# EAGLE board Placa_control_suelo (EAGLE 5.11)
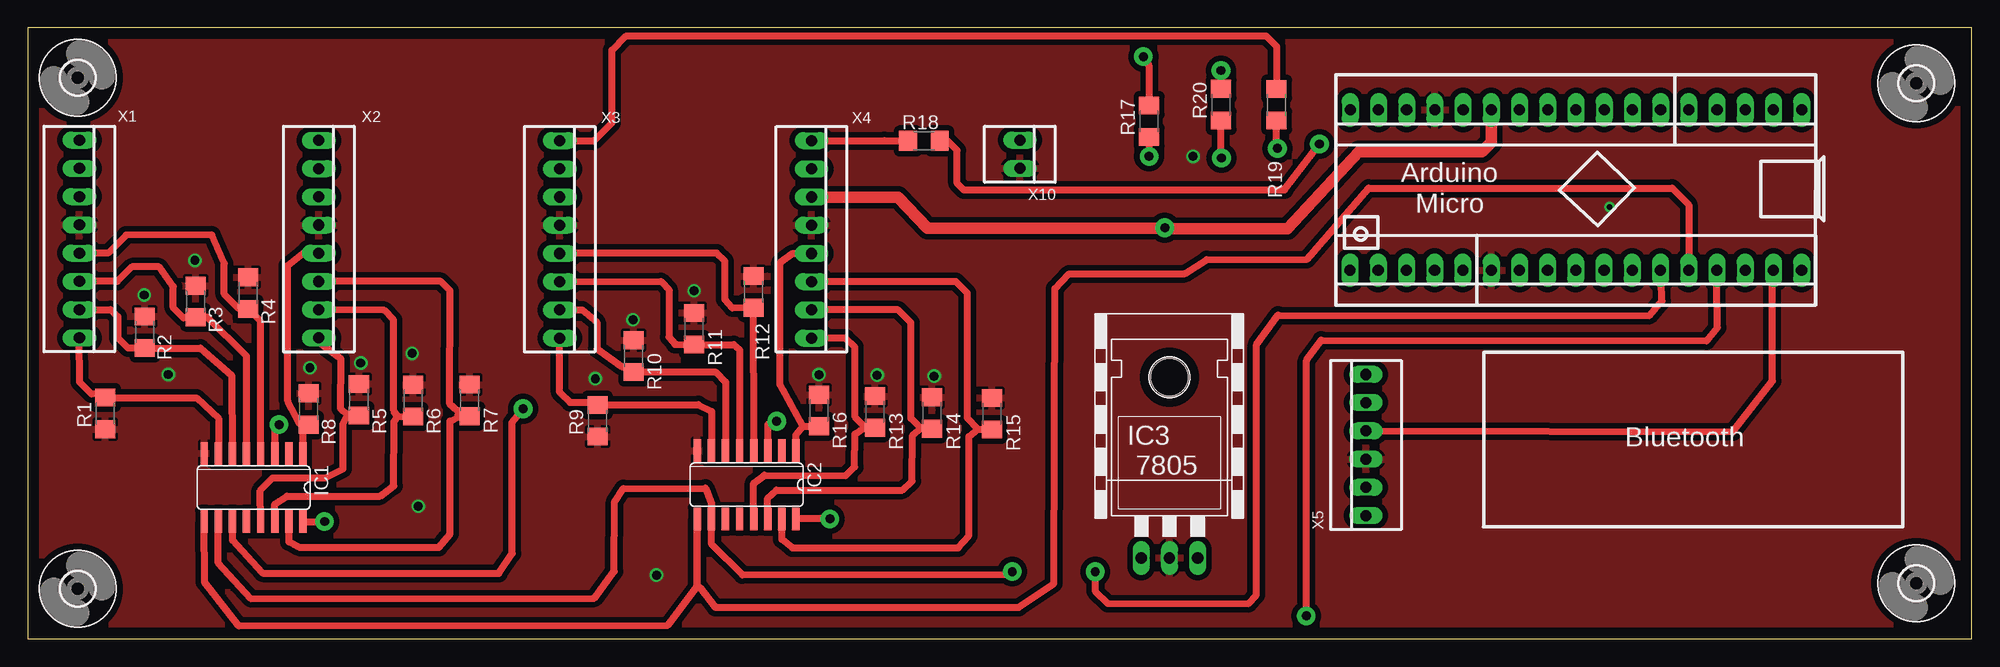
[diagram p0: board, top side]
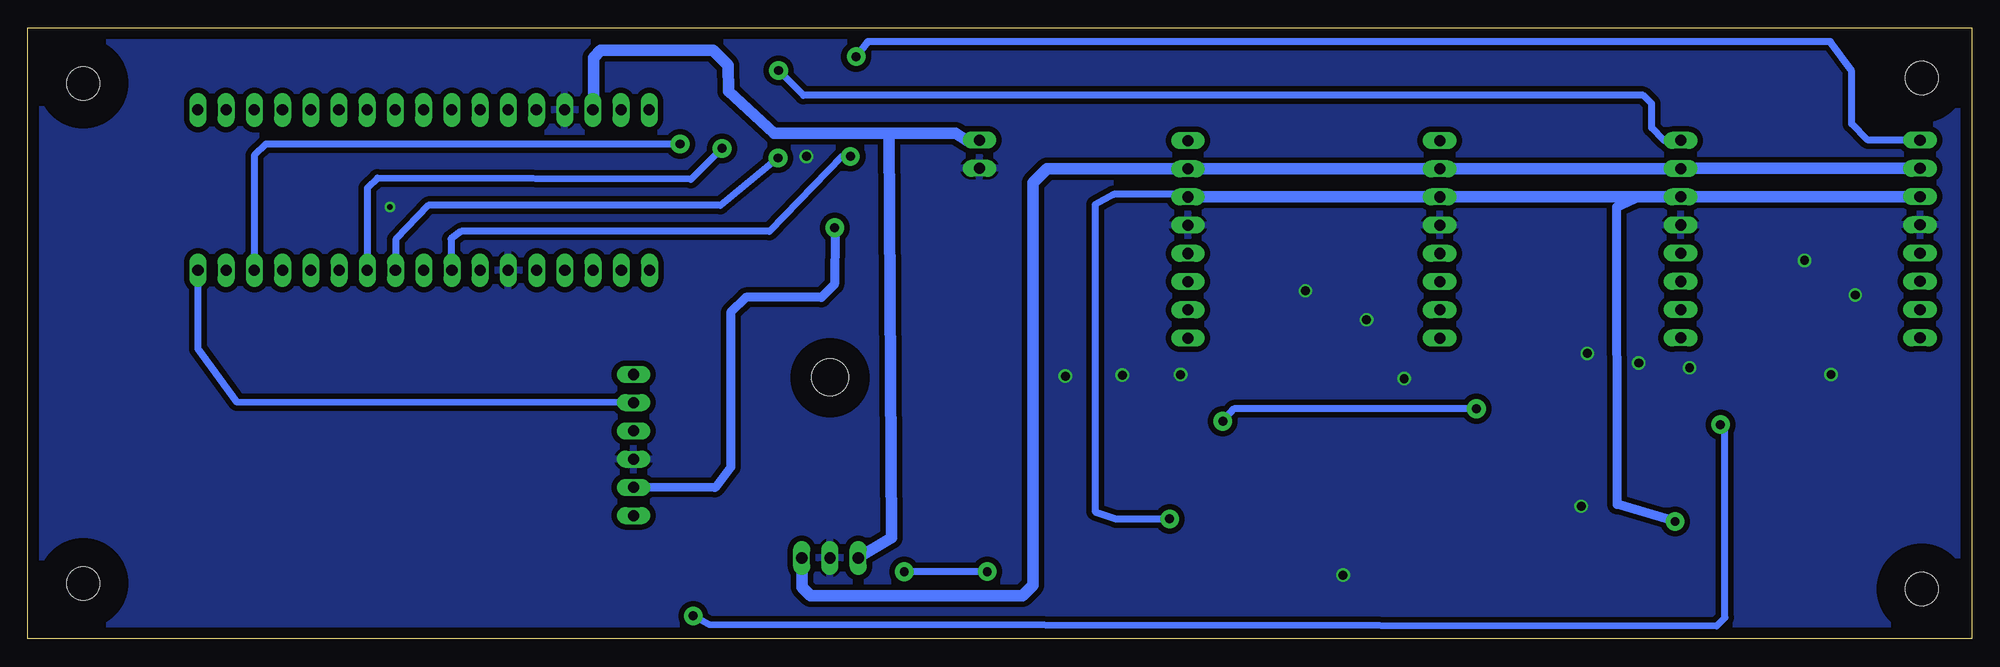
[diagram p1: board, bottom side, seen from below]

Size 175 x 55 mm. Coordinates in mm from the lower left corner, seen from the top.
Outline: 0,0 175,0 175,55 0,55 0,0
Copper layers (1*16): Top 0.035mm / dielectric 1.5mm / Bottom 0.035mm
Design rules "default *": minimum track width 10mil, minimum drill 24mil, track to track 0.5mm, track to pad 0.5mm, pad to pad 0.5mm, via to via 0.5mm, smd to smd 0.5mm, copper to edge 40mil, drill to drill 8mil, minimum pad ring 10mil, minimum via ring 8mil, stop-mask expansion 4mil, vias tented up to drill 0mil, thermal gap 10mil

## Footprints (pad centres in the part's own frame; a part is rotated, then mirrored left to right if it is on the bottom)
3,0 = hole 3: 0,0
SO16 = smd 0.66 x 2.032: 1 -4.445,-3.073; 2 -3.175,-3.073; 3 -1.905,-3.073; 4 -0.635,-3.073; 5 0.635,-3.073; 6 1.905,-3.073; 7 3.175,-3.073; 8 4.445,-3.073; 9 4.445,3.073; 10 3.175,3.073; 11 1.905,3.073; 12 0.635,3.073; 13 -0.635,3.073; 14 -1.905,3.073; 15 -3.175,3.073; 16 -4.445,3.073
78XXH = drill 1.016 long: GND 0,-5.08; IN -2.54,-5.08; OUT 2.54,-5.08 | hole 3.302: 0,11.176
R1206 = smd 1.6 x 1.803: 1 -1.422,0; 2 1.422,0
22-23-2081 = drill 1 long: 1 -8.89,0; 2 -6.35,0; 3 -3.81,0; 4 -1.27,0; 5 1.27,0; 6 3.81,0; 7 6.35,0; 8 8.89,0
22-23-2061 = drill 1 long: 1 -6.35,0; 2 -3.81,0; 3 -1.27,0; 4 1.27,0; 5 3.81,0; 6 6.35,0
22-23-2051 = drill 1 long: 1 -5.08,0; 2 -2.54,0; 3 0,0; 4 2.54,0; 5 5.08,0
22-23-2121 = drill 1 long: 1 -13.97,0; 2 -11.43,0; 3 -8.89,0; 4 -6.35,0; 5 -3.81,0; 6 -1.27,0; 7 1.27,0; 8 3.81,0; 9 6.35,0; 10 8.89,0; 11 11.43,0; 12 13.97,0
22-23-2021 = drill 1 long: 1 -1.27,0; 2 1.27,0

## Placement (x,y rotation side)
H1  MOUNT-HOLE3.0  [3,0]  170.01,50 0 top
H2  MOUNT-HOLE3.0  [3,0]  4.5,50.5 0 top
H3  MOUNT-HOLE3.0  [3,0]  4.5,4.5 0 top
H4  MOUNT-HOLE3.0  [3,0]  170.01,5 0 top
IC1  4021D  [SO16]  20.33,13.62 180 top
IC2  4021D  [SO16]  64.71,13.88 180 top
IC3  [78XXH]  102.78,12.37 0 top
R1  10K  [R1206]  6.99,20.3 90 top
R2  10K  [R1206]  10.54,27.6 270 top
R3  10K  [R1206]  15.1,30.37 270 top
R4  10K  [R1206]  19.84,31.12 270 top
R5  10K  [R1206]  29.81,21.52 270 top
R6  10K  [R1206]  34.68,21.44 270 top
R7  10K  [R1206]  39.79,21.47 270 top
R8  10K  [R1206]  25.28,20.69 270 top
R9  10K  [R1206]  51.29,19.63 90 top
R10  10K  [R1206]  54.55,25.45 270 top
R11  10K  [R1206]  60,27.91 270 top
R12  10K  [R1206]  65.32,31.23 270 top
R13  10K  [R1206]  76.26,20.43 270 top
R14  10K  [R1206]  81.42,20.33 270 top
R15  10K  [R1206]  86.79,20.26 270 top
R16  10K  [R1206]  71.24,20.55 270 top
R17  470R  [R1206]  100.94,46.59 90 top
R18  470R  [R1206]  80.67,44.83 180 top
R19  470R  [R1206]  112.42,48.07 90 top
R20  470R  [R1206]  107.42,48.08 90 top
X1  22-23-2081  [22-23-2081]  4.65,35.99 270 top
X2  22-23-2081  [22-23-2081]  26.2,35.98 270 top
X3  22-23-2081  [22-23-2081]  47.89,35.96 270 top
X4  22-23-2081  [22-23-2081]  70.55,35.96 270 top
X5  [22-23-2061]  120.47,17.45 90 top
X6  22-23-2051  [22-23-2051]  154.61,47.61 180 top
X7  22-23-2121  [22-23-2121]  145.71,33.17 180 top
X8  22-23-2121  [22-23-2121]  133.02,47.61 180 top
X9  22-23-2051  [22-23-2051]  124.11,33.17 180 top
X10  22-23-2021  [22-23-2021]  89.32,43.62 270 top

## Library data of the parts
H1-H4 = holes
IC1 IC2 = 40xx-2
IC3 = 78xx_with_heatsink
R1-R20 = rcl-2(1)
X1-X10 = con-molex

## Nets
N$1: R18.2 X4.1
N$2: R17.2 X1.1
N$3: R20.2 X2.1
N$4: IC1.9 IC2.9 X7.5
N$5: IC1.10 IC2.10 X7.6
N$6: IC1.11 IC2.3
N$7: IC1.7 R1.2 X1.8
N$8: IC1.6 R2.2 X1.7
N$9: IC1.5 R3.2 X1.6
N$10: IC1.4 R4.2 X1.5
N$11: IC1.13 R5.2 X2.8
N$12: IC1.14 R6.2 X2.7
N$13: IC1.15 R7.2 X2.6
N$14: IC1.1 R8.2 X2.5
N$15: IC2.7 R9.2 X3.8
N$16: IC2.6 R10.2 X3.7
N$17: IC2.4 R12.2 X3.5
N$18: IC2.5 R11.2 X3.6
N$19: IC2.13 R13.2 X4.8
N$20: IC2.14 R14.2 X4.7
N$21: IC2.15 R15.2 X4.6
N$22: IC2.1 R16.2 X4.5
N$23: R19.2 X3.1
N$24: IC1.3 X7.4
N$25: X5.4 X7.2
N$26: X5.5 X7.1
N$27: IC3.IN X8.10 X10.1
N$28: R17.1 X7.10
N$29: IC3.OUT X1.2 X2.2 X3.2 X4.2
N$30: R18.1 X7.3
N$31: R19.1 X7.7
N$32: R20.1 X7.8
VDD: IC1.16 IC2.16 X1.3 X2.3 X3.3 X4.3 X5.2 X8.7
VSS: IC1.8 IC2.8 IC3.GND R1.1 R2.1 R3.1 R4.1 R5.1 R6.1 R7.1 R8.1 R9.1 R10.1 R11.1 R12.1 R13.1 R14.1 R15.1 R16.1 X1.4 X2.4 X3.4 X4.4 X5.3 X7.12 X8.9 X10.2

## Tracks (layer width: path | path; a pad name or v marks a point on that pad's centre or on a via)
N$1
  Top 0.61: X4.1 77.12,44.85 R18.2
N$2  (via drill 0.8 pad 1.68)
  Top 0.61: v100.43,52.4 100.92,51.61 R17.2
  Bottom 0.61: X1.1 9.34,44.88 10.81,46.35 10.81,51.12 12.73,53.76 99.39,53.76 v100.43,52.4
N$3  (via drill 0.8 pad 1.68)
  Top 0.61: v107.41,51.16 107.41,49.51 R20.2
  Bottom 0.61: X2.1 27.7,44.87 28.82,45.99 28.82,48.17 29.57,48.92 105.17,48.92 v107.41,51.16
N$4
  Top 0.61: IC1.9 15.9,5.12 19,1.18 57.63,1.24 60.26,4.7 60.25,7.22 IC2.9 60.27,4.72 60.38,4.61 60.52,4.61 61.89,2.84 89.21,2.84 92.36,4.98 92.45,31.53 93.74,32.86 104.16,32.87 106.14,34.13 115.15,34.15 120.69,40.56 148.04,40.56 149.52,39.08 X7.5
N$5  (via drill 0.8 pad 1.68)
  Top 0.61: IC1.10 17.14,6.8 20.08,3.62 51.02,3.66 52.79,6.07 52.84,12.35 53.6,13.53 61,13.56 61.55,12.14 61.55,11.74 | 61.55,11.74 IC2.10 | 61.55,11.74 61.52,8.57 64.33,5.76 88.1,5.8 v88.63,6.06 | v96.09,6.04 96.09,4.31 97.2,3.2 109.9,3.18 110.59,3.95 110.61,26.48 112.55,29.15 145.96,29.09 147.11,30.43 147.07,32.22 X7.6
  Bottom 0.61: v88.63,6.06 v96.09,6.04
N$6  (via drill 0.8 pad 1.68)
  Top 0.61: IC1.11 18.45,8.87 21.13,5.93 42.41,5.89 43.62,7.7 43.59,19.49 v44.59,20.71 | v67.42,19.59 66.61,19.27 IC2.3
  Bottom 0.61: v44.59,20.71 66.43,20.71 v67.42,19.59
N$7
  Top 0.61: X1.8 4.67,23.1 5.72,22.05 6.94,22.03 R1.2 15.2,21.7 17.18,19.85 17.2,16.85 IC1.7
N$8
  Top 0.61: X1.7 7.46,29.64 8.1,29 8.1,27.1 9,26.2 10.52,26.2 R2.2 15.53,26.18 18.37,23.67 18.4,16.72 IC1.6
N$9
  Top 0.61: X1.6 8.06,32.18 9.37,33.49 11.83,33.48 13.1,31.7 13.1,29.8 14,28.9 15.05,28.9 R3.2 16.15,28.95 19.7,25.44 IC1.5
N$10
  Top 0.61: X1.5 7.23,34.72 8.85,36.34 16.57,36.35 17.7,33.8 17.7,31 18.9,29.8 19.74,29.8 R4.2 20.96,28.57 IC1.4
N$11
  Top 0.61: IC1.13 20.93,13.37 22.04,14.5 26.76,14.48 28.38,15.3 28.38,19.35 28.81,20.15 | 28.81,20.15 29.5,20.09 R5.2 | X2.8 26.2,26.71 28.2,25.19 28.16,20.73 28.81,20.15
N$12
  Top 0.61: X2.7 32.12,29.57 32.93,28.72 32.94,20.55 33.3,20.02 | 33.3,20.02 34.28,19.99 R6.2 | IC1.14 22.25,12.12 23.35,12.86 31.71,12.86 32.95,13.78 32.96,19.56 33.3,20.02
N$13
  Top 0.61: X2.6 37.19,32.17 38.01,31.34 37.98,21.15 39.11,20.16 | 39.11,20.16 38.71,20.16 R7.2 | IC1.15 23.52,8.72 24.39,8.26 37,8.24 38.01,9.46 38.02,19.61 38.86,20.04 39.63,20.22 39.11,20.16
N$14
  Top 0.61: IC1.1 24.79,19.52 R8.2 24.42,19.44 23.41,21.41 23.39,33.6 24.79,34.7 X2.5
N$15
  Top 0.61: X3.8 47.89,22.19 48.81,21.28 51.13,21.28 R9.2 51.69,21.07 53.74,21.07 60.36,21.09 61.57,20.47 61.57,17.77 IC2.7
N$16
  Top 0.61: X3.7 49.92,29.61 51.25,28.48 51.25,26.11 53.49,24.5 54.13,24.4 R10.2 61.9,24.03 62.82,23.11 62.82,17.67 IC2.6
N$17
  Top 0.61: X3.5 62.02,34.72 62.75,33.99 62.75,30.54 63.43,29.77 65.18,29.8 R12.2 65.37,18.05 IC2.4
N$18
  Top 0.61: X3.6 57,32.17 57.73,31.44 57.73,27.18 58.32,26.52 58.26,26.51 R11.2 63.55,26.49 64.09,26.02 64.09,17.84 IC2.5
N$19
  Top 0.61: IC2.13 65.34,14.02 66.31,14.73 73.62,14.69 74.43,15.48 74.46,18.44 75.38,19.05 | 75.38,19.05 76.19,19.08 R13.2 | X4.8 73.62,27.07 74.47,26.27 74.49,19.95 75.38,19.05
N$20
  Top 0.61: IC2.14 66.61,12.66 67.39,13.38 78.74,13.38 79.62,14.19 79.65,18.34 80.4,18.95 | 80.4,18.95 81.46,19.02 R14.2 | X4.7 78.35,29.61 79.5,28.46 79.5,19.84 80.4,18.95
N$21
  Top 0.61: IC2.15 67.89,8.96 68.83,8.2 83.76,8.2 84.73,9.29 84.72,18.21 85.54,18.87 | 85.54,18.87 86.54,18.87 R15.2 | X4.6 83.55,32.15 84.59,31.11 84.59,19.86 85.54,18.87
N$22
  Top 0.61: 69.78,19.15 R16.2 | 69.78,19.15 67.7,22.91 67.74,33.89 68.85,34.69 X4.5 | IC2.1 69.14,18.36 69.78,19.15
N$23
  Top 0.61: X3.1 50.99,44.85 52.58,46.44 52.58,52.98 53.87,54.27 111.47,54.27 112.42,53.32 R19.2
N$24  (via drill 0.8 pad 1.68)
  Top 0.61: IC1.3 22.23,18.89 v22.62,19.28 | v115.09,2.07 115.12,25.07 116.44,26.88 151.13,26.83 152.1,28.02 152.05,32.3 X7.4
  Bottom 0.61: v22.62,19.28 22.58,19.28 22.21,18.91 22.21,1.92 22.98,1.15 113.65,1.29 v115.09,2.07
N$25
  Top 0.61: X7.2 157.07,32.24 157.07,23.21 153.5,18.63 X5.4
N$26
  Bottom 0.61: X7.1 159.66,32.29 159.66,26.1 156.15,21.3 X5.5
N$27
  Bottom 1.016: 97.48,45.52 91.47,45.51 90.5,44.89 X10.1 | 97.48,45.52 107.8,45.52 111.93,49.3 111.94,51.61 113.3,52.97 123.42,52.97 124.07,52.32 124.07,47.67 X8.10 124.13,48 124,48 | IC3.IN 97.26,9.1 97.48,45.52
N$28  (via drill 0.8 pad 1.68)
  Top 0.61: R17.1 v100.94,43.43
  Bottom 0.61: v100.94,43.43 101.71,43.43 108.23,36.68 135.97,36.68 136.89,35.99 136.89,33.24 X7.10
N$29
  Bottom 1.016: X1.2 X2.2 47.89,42.33 X3.2 X4.2 83.27,42.31 84.51,41.07 84.51,4.83 85.45,3.89 104.55,3.89 105.31,4.65 IC3.OUT
N$30  (via drill 0.8 pad 1.68)
  Top 0.61: R18.1 82.8,44.83 83.67,43.96 83.67,41 84.25,40.42 99,40.42 99.44,40.41 113.13,40.41 v116.28,44.54
  Bottom 0.61: v116.28,44.54 153.58,44.54 154.61,43.51 X7.3
N$31  (via drill 0.8 pad 1.68)
  Top 0.61: R19.1 112.42,44.6 v112.5,44.14
  Bottom 0.61: v112.5,44.14 112.53,44.12 115.29,41.36 143.52,41.48 144.44,40.56 X7.7
N$32  (via drill 0.8 pad 1.68)
  Top 0.61: R20.1 107.42,43.32 v107.46,43.28
  Bottom 0.61: v107.46,43.28 112.64,39.01 138.95,39.01 141.86,35.95 141.86,33.21 X7.8
VDD  (via drill 0.8 pad 1.68)
  Top 0.61: IC2.16 v72.21,10.81 v72.21,10.8 | IC1.16 26.71,10.55 v26.71,10.57
  Top 1.016: X4.3 70.42,39.69 71,39.76 78.33,39.76 81.02,36.97 102.24,36.97 v102.36,37 102.28,36.95 102.5,36.91 113.41,36.92 119.85,43.83 130.88,43.83 131.76,44.71 X8.7
  Bottom 0.61: X4.3 70.55,40 77.22,40 78.91,39.08 78.91,11.46 77.04,10.8 v72.21,10.8
  Bottom 0.813: X2.3 29.86,39.79 31.97,38.87 31.91,12.1 v26.71,10.57 | v102.36,37 102.35,36.62 102.38,31.91 103.55,30.74 110.36,30.74 111.72,29.38 111.72,15.47 113.14,13.62 X5.2
  Bottom 1.016: X1.3 X2.3 47.89,39.79 X3.3 X4.3
VSS  (via drill 0.5, 0.8)
  other vias: 35.15,11.94 25.4,24.4 29.98,24.83 34.6,25.69 10.48,30.95 15.05,34.06 12.66,23.8 56.6,5.74 51.09,23.42 54.48,28.72 59.98,31.33 71.22,23.78 76.46,23.74 81.59,23.65 142.4,38.87 104.9,43.42
  pour Top: 0,55 175,55 175,-0.1 0,-0.1
  pour Bottom: 0,55 175,55 175,-0.1 0,-0.1

## Text on the board
tPlace: Arduino | Micro | Bluetooth | 7805
tDocu: Alimentador | 9-12Vdc | Din | Din | Din | Din | V+ | +LED | +LED | +LED | +LED | GND | +FSR | +FSR | +FSR | +FSR | GND | GND | GND | GND | 4 | 4 | 4 | 4 | 3 | 3 | 3 | 3 | 2 | 2 | 2 | 2 | 1 | 1 | 1 | 1 | RX | TX | GND | V+ | © 2017 - Museos Científicos Coruñeses